# Altium PCB MPCBoard.PcbDoc
Units mil, origin at the board's own origin, x right, y up, seen from the top; angles counter-clockwise.
Board outline 5708.66 x 3740.16 mil, 2 copper layers (Top Layer, Bottom Layer); 110 components, 81 nets, 382 pads, 56 vias.
Unrouted connection lines stored in the file: 212.
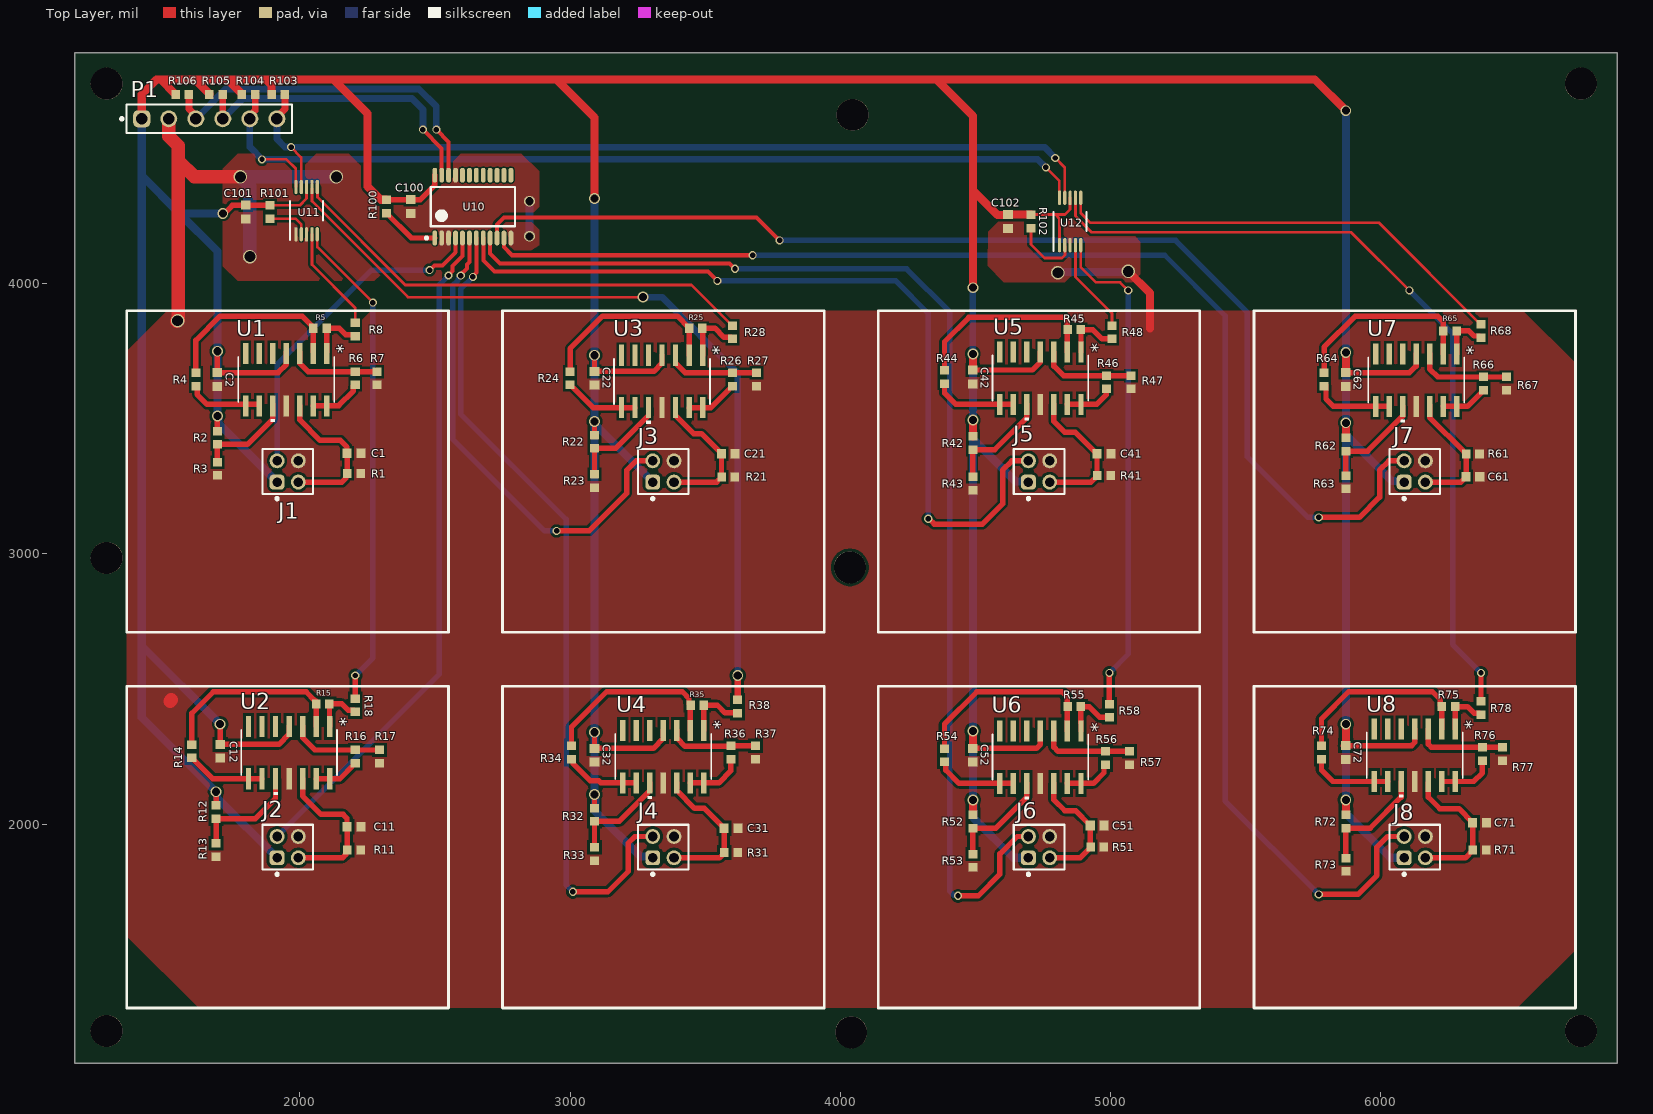
[diagram p0: Top Layer view]
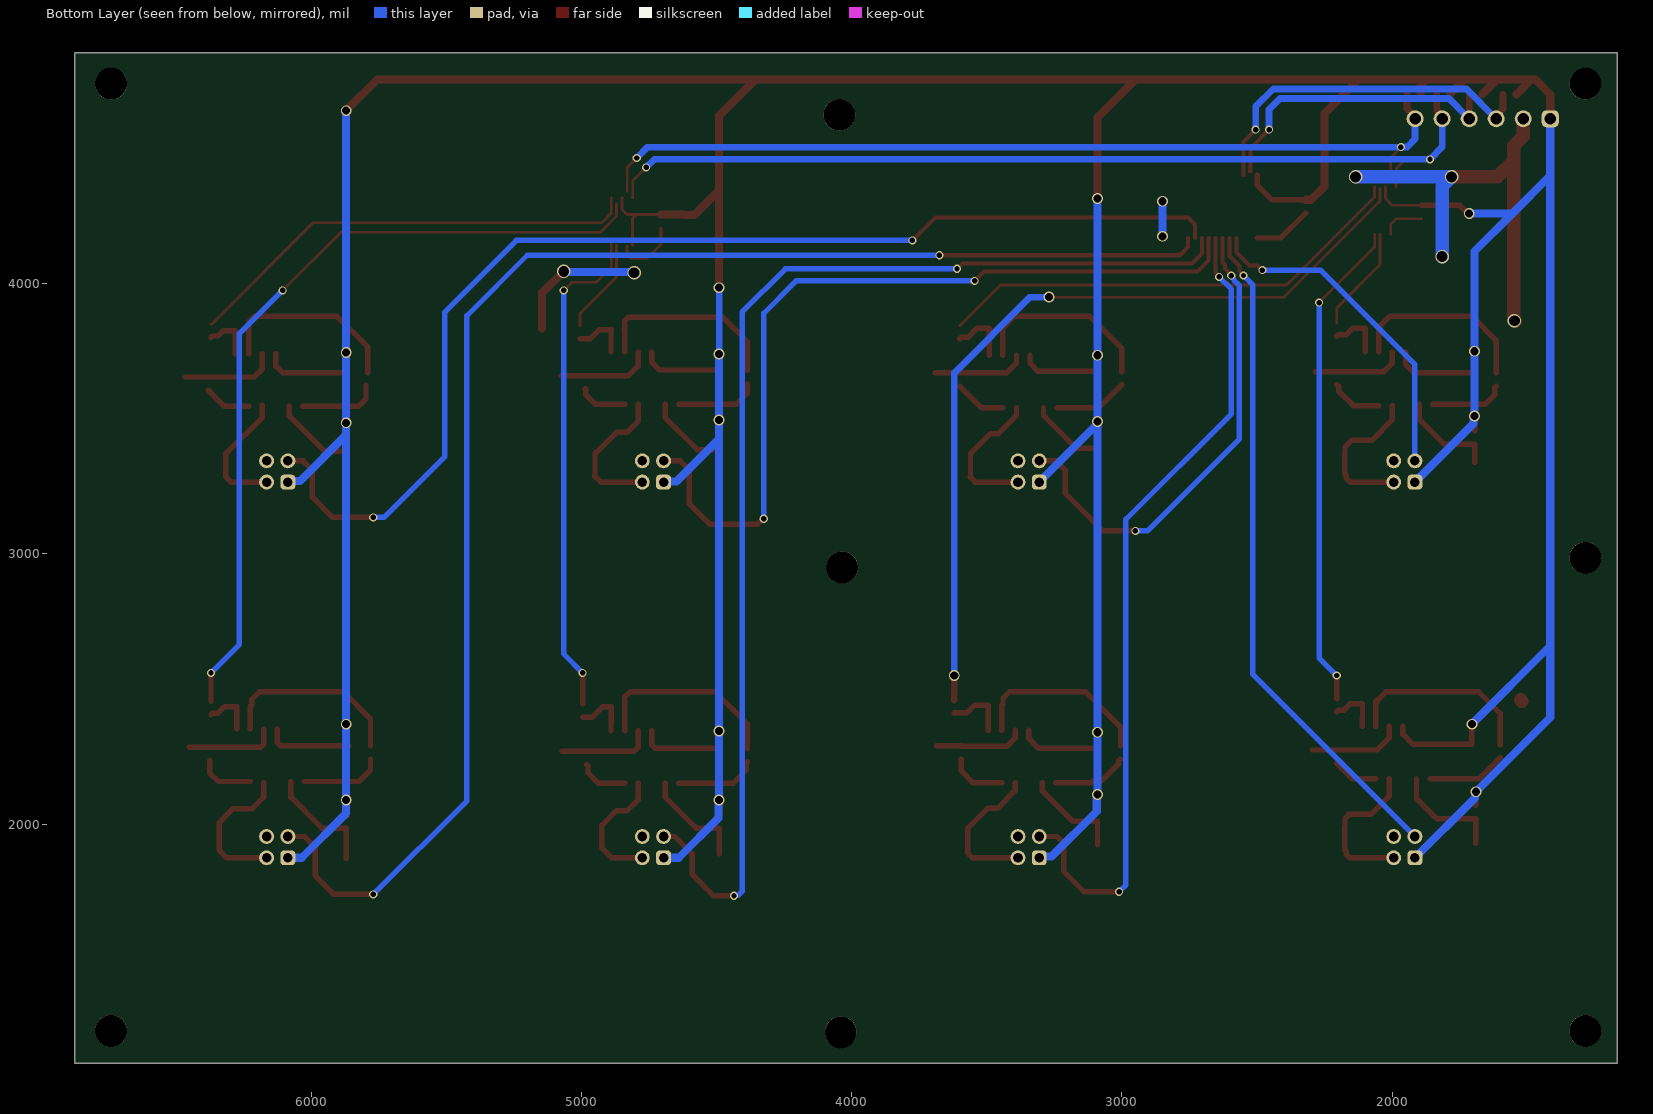
[diagram p1: Bottom Layer view, seen from below]

## Layer stack, top to bottom
Top Solder: solder mask 0.4, Solder Resist, Dk 3.5
Top Layer: signal copper 1.4
Dielectric 1: dielectric 12.6, FR-4, Dk 4.8
Bottom Layer: signal copper 1.4
Bottom Solder: solder mask 0.4, Solder Resist, Dk 3.5

## Board outline
1166.34,1114.84 1166.34,4855 6875,4855 6875,1114.84

## Design rules (kind name [scope] priority, off if disabled: settings)
Clearance Clearance_2 [InComponent('U10')] p1: gap=5 ignorepadtopadclearanceinfootprint=FALSE
Clearance [InComponent('U11') or InComponent('U12')] p2: gap=5 ignorepadtopadclearanceinfootprint=FALSE
Clearance Clearance_1 [All] p3: gap=10 ignorepadtopadclearanceinfootprint=FALSE
HoleSize [All] p1: absolutevalues=TRUE maxlimit=300 minlimit=1 maxpercent=80.000 minpercent=20.000
MinimumSolderMaskSliver [All] p1: minsoldermaskwidth=3
PolygonConnect [All] p1: connectstyle=Direct reliefconductorwidth=10 reliefentries=4 polygonreliefangle="90 Angle" airgapwidth=10
RoutingVias [All] p1: holewidth=28 width=50 viastyle="Through Hole" minholewidth=20 minwidth=30 maxholewidth=40 maxwidth=50
SilkToSilkClearance [All] p1: silktosilkclearance=5
SilkToSolderMaskClearance [IsPad] p1: minsilkscreentomaskgap=4 clearancetoexposedcopper=TRUE
SolderMaskExpansion [All] p1: expansion=4 istentingtop=FALSE
SupplyNets "Schematic Supply Nets_1" [InNet('GND')] p1: voltage=0.000
SupplyNets "Schematic Supply Nets" [InNet('+5V')] p2: voltage=0.000
Width [All] p1: maxlimit=50 minlimit=10 preferedwidth=15 minimp=50.000000 maximp=50.000000 favimp=50.000000
26 further rules are at their usual default settings.

## Components (designator, comment, footprint, x,y, rotation, side; value= is the part's Value field where it differs from the comment)
C1 "100n" CAPC0603(1608)100_N 2200.02,3371.73 r180 top
C2 "100n" CAPC0603(1608)100_N 1695,3645 r270 top
C11 "100n" CAPC0603(1608)100_N 2200,1990 r180 top
C12 "100n" CAPC0603(1608)100_N 1705,2270 r270 top
C21 "100n" CAPC0603(1608)100_N 3585,3370 r180 top
C22 "100n" CAPC0603(1608)100_N 3090,3650 r270 top
C31 "100n" CAPC0603(1608)100_N 3595,1985 r180 top
C32 "100n" CAPC0603(1608)100_N 3090,2255 r270 top
C41 "100n" CAPC0603(1608)100_N 4975,3370 r180 top
C42 "100n" CAPC0603(1608)100_N 4490,3655 r270 top
C51 "100n" CAPC0603(1608)100_N 4950,1995 r180 top
C52 "100n" CAPC0603(1608)100_N 4490,2255 r270 top
C61 "100n" CAPC0603(1608)100_N 6340,3285 r180 top
C62 "100n" CAPC0603(1608)100_N 5870,3645 r270 top
C71 "100n" CAPC0603(1608)100_N 6365,2005 r180 top
C72 "100n" CAPC0603(1608)100_N 5870,2265 r270 top
C100 "100n" CAPC0603(1608)100_N 2410,4285 r90 top
C101 "100n" CAPC0603(1608)100_N 1800,4265 r90 top
C102 "100n" CAPC0603(1608)100_N 4620,4230 r90 top
J1 "62000421821" 62000421821 1955,3305 r0 top locked
J2 "62000421821" 62000421821 1955,1915 r0 top locked
J3 "62000421821" 62000421821 3345,3305 r0 top locked
J4 "62000421821" 62000421821 3345,1915 r0 top locked
J5 "62000421821" 62000421821 4735,3305 r0 top locked
J6 "62000421821" 62000421821 4735,1915 r0 top locked
J7 "62000421821" 62000421821 6125,3305 r0 top locked
J8 "62000421821" 62000421821 6125,1915 r0 top locked
P1 "61300611121" 61300611121 1665,4610 r0 top
R1 "RES" RESC0603(1608)_N 2200.02,3296.73 r0 top
R2 "RES" RESC0603(1608)_N 1695,3430 r270 top
R3 "RES" RESC0603(1608)_N 1695,3315 r270 top
R4 "10k" RESC0603(1608)_N 1615,3645 r90 top
R5 "10k" RESC0603(1608)_N 2075,3835 r180 top
R6 "10k" RESC0603(1608)_N 2205,3650 r90 top
R7 "10k" RESC0603(1608)_N 2285,3650 r90 top
R8 "100" RESC0603(1608)_N 2205,3830 r270 top
R11 "RES" RESC0603(1608)_N 2200,1905 r0 top
R12 "RES" RESC0603(1608)_N 1690,2045 r270 top
R13 "RES" RESC0603(1608)_N 1690,1905 r270 top
R14 "10k" RESC0603(1608)_N 1600,2270 r90 top
R15 "10k" RESC0603(1608)_N 2085,2445 r180 top
R16 "10k" RESC0603(1608)_N 2205,2250 r90 top
R17 "10k" RESC0603(1608)_N 2295,2250 r90 top
R18 "100" RESC0603(1608)_N 2205,2440 r270 top
R21 "RES" RESC0603(1608)_N 3585,3285 r0 top
R22 "RES" RESC0603(1608)_N 3090,3415 r270 top
R23 "RES" RESC0603(1608)_N 3090,3270 r270 top
R24 "10k" RESC0603(1608)_N 3000,3650 r90 top
R25 "10k" RESC0603(1608)_N 3465,3835 r180 top
R26 "10k" RESC0603(1608)_N 3600,3645 r90 top
R27 "10k" RESC0603(1608)_N 3690,3645 r90 top
R28 "100" RESC0603(1608)_N 3600,3820 r270 top
R31 "RES" RESC0603(1608)_N 3595,1895 r0 top
R32 "RES" RESC0603(1608)_N 3090,2035 r270 top
R33 "RES" RESC0603(1608)_N 3090,1890 r270 top
R34 "10k" RESC0603(1608)_N 3005,2265 r90 top
R35 "10k" RESC0603(1608)_N 3470,2440 r180 top
R36 "10k" RESC0603(1608)_N 3595,2265 r90 top
R37 "10k" RESC0603(1608)_N 3685,2265 r90 top
R38 "100" RESC0603(1608)_N 3620,2435 r270 top
R41 "RES" RESC0603(1608)_N 4975,3290 r0 top
R42 "RES" RESC0603(1608)_N 4490,3410 r270 top
R43 "RES" RESC0603(1608)_N 4490,3260 r270 top
R44 "10k" RESC0603(1608)_N 4385,3655 r90 top
R45 "10k" RESC0603(1608)_N 4865,3830 r180 top
R46 "10k" RESC0603(1608)_N 4985,3635 r90 top
R47 "10k" RESC0603(1608)_N 5075,3635 r90 top
R48 "100" RESC0603(1608)_N 5005,3820 r270 top
R51 "RES" RESC0603(1608)_N 4950,1915 r0 top
R52 "RES" RESC0603(1608)_N 4490,2010 r270 top
R53 "RES" RESC0603(1608)_N 4490,1865 r270 top
R54 "10k" RESC0603(1608)_N 4385,2255 r90 top
R55 "10k" RESC0603(1608)_N 4865,2435 r180 top
R56 "10k" RESC0603(1608)_N 4980,2245 r90 top
R57 "10k" RESC0603(1608)_N 5070,2245 r90 top
R58 "100" RESC0603(1608)_N 4995,2420 r270 top
R61 "RES" RESC0603(1608)_N 6340,3370 r0 top
R62 "RES" RESC0603(1608)_N 5870,3405 r270 top
R63 "RES" RESC0603(1608)_N 5870,3265 r270 top
R64 "10k" RESC0603(1608)_N 5790,3645 r90 top
R65 "10k" RESC0603(1608)_N 6255,3825 r180 top
R66 "10k" RESC0603(1608)_N 6380,3630 r90 top
R67 "10k" RESC0603(1608)_N 6465,3630 r90 top
R68 "100" RESC0603(1608)_N 6370,3825 r270 top
R71 "RES" RESC0603(1608)_N 6365,1905 r0 top
R72 "RES" RESC0603(1608)_N 5870,2010 r270 top
R73 "RES" RESC0603(1608)_N 5870,1850 r270 top
R74 "10k" RESC0603(1608)_N 5780,2265 r90 top
R75 "10k" RESC0603(1608)_N 6250,2435 r180 top
R76 "10k" RESC0603(1608)_N 6375,2260 r90 top
R77 "10k" RESC0603(1608)_N 6450,2260 r90 top
R78 "100" RESC0603(1608)_N 6370,2429.61 r270 top
R100 "1K" RESC0603(1608)_N 2320,4285 r270 top
R101 "1K" RESC0603(1608)_N 1890,4265 r270 top
R102 "1K" RESC0603(1608)_N 4705,4230 r270 top
R103 "1K" RESC0603(1608)_N 1920,4700 r180 top
R104 "1K" RESC0603(1608)_N 1810,4700 r180 top
R105 "1K" RESC0603(1608)_N 1690,4700 r180 top
R106 "1K" RESC0603(1608)_N 1565,4700 r180 top
U1 "TS914" SO-14_STM 1950,3645 r270 top
U2 "TS914" SO-14_STM 1960,2265 r270 top
U3 "TS914" SO-14_STM 3340,3638 r270 top
U4 "TS914" SO-14_STM 3345,2250 r270 top
U5 "TS914" SO-14_STM 4740,3650 r270 top
U6 "TS914" SO-14_STM 4740,2248 r270 top
U7 "TS914" SO-14_STM 6130,3643 r270 top
U8 "TS914" SO-14_STM 6125,2255 r270 top
U10 "PCA9535A" TSSOP24-8N 2640,4285 r90 top
U11 "ADS1015IDGST" DGS0010A_N 2025,4270 r90 top
U12 "ADS1015IDGST" DGS0010A_N 4850,4230 r90 top

## Footprints (in the part's own frame and the unit in brackets; to place one, negate y for a bottom-side part, rotate by r counter-clockwise, add the part's x,y. Pads: shape width x height; smd on the part's side, far side on the other; paste and mask are expansions set on the pad)
61300611121 [mm] "Pin Header, pitch 2.54 mm, THT, Vertical, single row, 6p"
  rrect50% 1.6x1.6 hole 1.1: 1(-6.35,0)
  round 1.6 hole 1.1: 2(-3.81,0) 3(-1.27,0) 4(1.27,0) 5(3.81,0) 6(6.35,0)
  silkscreen extent -8.34,-1.35 7.77,1.35, body extent -7.62,-1.27 7.62,1.27, height 8.57
62000421821 [mm] "Socket Header, Pitch 2.00 mm, THT, Vertical, dual row, 4p"
  rrect50% 1.4x1.4 hole 0.9: 1(-1,-1)
  round 1.4 hole 0.9: 2(-1,1) 3(1,-1) 4(1,1)
  silkscreen extent -2.37,-2.67 2.37,2.1, body extent -2.3,-2 2.3,2, height 4.35
CAPC0603(1608)100_N [mm] "Chip Capacitor, 2-Leads, Body 1.60x0.80mm, IPC High Density"
  rect 0.85x0.9 smd: 1(-0.65,0) 2(0.65,0)
  body extent -0.88,-0.48 0.87,0.48, height 0.45
DGS0010A_N [mm]
  oval 1.35x0.3 smd paste+0 mask+0.051: 1(-2.225,1) 2(-2.225,0.5) 3(-2.225,0) 4(-2.225,-0.5) 5(-2.225,-1) 6(2.225,-1) 7(2.225,-0.5) 8(2.225,0) 9(2.225,0.5) 10(2.225,1)
  silkscreen extent -2.75,-1.55 0.9,1.55
RESC0603(1608)_N [mm] "Chip Resistor, 2-Leads, Body 1.60x0.80mm, IPC High Density"
  rect 0.8x0.85 smd: 1(-0.625,0) 2(0.625,0)
  body extent -0.87,-0.48 0.87,0.48, height 0.45
SO-14_STM [mil]
  rect 78x20 smd paste+0 mask+0: 1(-97,150) 2(-97,100) 3(-97,50) 4(-97,0) 5(-97,-50) 6(-97,-100) 7(-97,-150) 8(97,-150) 9(97,-100) 10(97,-50) 11(97,0) 12(97,50) 13(97,100) 14(97,150)
  silkscreen extent -84,-178 156,178, body extent -122,-173 122,173, height 69
TSSOP24-8N [mm]
  oval 1.4x0.45 smd: 1(-2.95,3.575) 2(-2.95,2.925) 3(-2.95,2.275) 4(-2.95,1.625) 5(-2.95,0.975) 6(-2.95,0.325) 7(-2.95,-0.325) 8(-2.95,-0.975) 9(-2.95,-1.625) 10(-2.95,-2.275) 11(-2.95,-2.925) 12(-2.95,-3.575) 13(2.95,-3.575) 14(2.95,-2.925) 15(2.95,-2.275) 16(2.95,-1.625) 17(2.95,-0.975) 18(2.95,-0.325) 19(2.95,0.325) 20(2.95,0.975) 21(2.95,1.625) 22(2.95,2.275) 23(2.95,2.925) 24(2.95,3.575)
  silkscreen extent -3.07,-3.95 1.85,4.47, body extent -3.2,-3.9 3.2,3.9, height 1.2

## Part data
C1 C2 C11 C12 C21 C22 C31 C32 C41 C42 C51 C52 C61 C62 C71 C72 C100 C101 C102: library part CAP, "CAP"
J1 J2 J3 J4 J5 J6 J7 J8: "WR-PHD Socket Header, THT, Vertical, pitch 2mm, 2 Row, 4P", Contact Resistance=20mOhm, Manufacturer="Wurth Elektronik", Operating Temperature Max=105°C, Operating Temperature Min=-40°C, Rated Current=2A, Withstanding Voltage=500V, Working Voltage=250V, Category="Board-to-Board Connectors", ComponentLink1Description="Website Link", ComponentLink1URL=https://www.we-online.com/redexpert/article/62000421821?ad, ComponentLink2Description="Datasheet Link", ComponentLink2URL=https://www.we-online.com/redexpert/spec/62000421821?ad, Gender="Socket Header", Manufacturer Part Number=62000421821, Match Code=WR-PHD, Mount="Through Hole", Number of Pins=4, Number of Rows=2, Orientation=Vertical, Packaging=Tube, Pitch=2mm
P1: "WR-PHD Pin Header, THT, Vertical, pitch 2.54mm, 1 Row, 6P", Contact Resistance=20mOhm, Manufacturer="Wurth Elektronik", Operating Temperature Max=105°C, Operating Temperature Min=-40°C, Rated Current=3A, Withstanding Voltage=500V, Working Voltage=250V, Category="Board-to-Board Connectors", ComponentLink1Description="Website Link", ComponentLink1URL=https://www.we-online.com/redexpert/article/61300611121?ad, ComponentLink2Description="Datasheet Link", ComponentLink2URL=https://www.we-online.com/redexpert/spec/61300611121?ad, Gender="Pin Header", Manufacturer Part Number=61300611121, Match Code=WR-PHD, Mount="Through Hole", Number of Pins=6, Number of Rows=1, Orientation=Vertical, Packaging=Bag, Pitch=2.54mm
R4 R5 R6 R7 R8 R14 R15 R16 R17 R18 R24 R25 R26 R27 R28 R34 R35 R36 R37 R38 R44 R45 R46 R47 R48 R54 R55 R56 R57 R58 R64 R65 R66 R67 R68 R74 R75 R76 R77 R78 R100 R101 R102 R103 R104 R105 R106: library part RES, "RES"
U10: "Low-voltage 16-bit I2C-bus I/O port with interrupt"
U11 U12: "12-bit, 3.3-kSPS, 4-channel, delta-sigma ADC with PGA, oscillator, VREF, comparator and I2C 10-VSSOP -40 to 125", Manufacturer="Texas Instruments", PartNumber=ADS1015IDGSR, Alternate_PartNumber=ADS1015IDGST, CompType=IC, Copyright="Copyright (C) 2025 Ultra Librarian. All rights reserved.", Datasheet=https://www.ti.com/lit/gpn/ads1015, Manufacturer_Name="Texas Instruments", Manufacturer_Part_Number=ADS1015IDGST, MountType=SMT, PackageReference=DGS0010A, RefDes=RefDes, RoHS=Y, Type=TYPE

## Free pads (board coordinates)
  round 118.11 hole 118.11: 14(1285,1235) 14(1285,2985) 14(1285,4740) 14(4035,2950) 14(4040,1230) 14(4045,4625) 14(6740,1235) 14(6740,4740)

## Via types
v1: diameter 30, hole 20, Top Layer to Bottom Layer, tented both sides, 26 vias
v2: diameter 40, hole 30, Top Layer to Bottom Layer, tented both sides, 24 vias
v3: diameter 50, hole 40, Top Layer to Bottom Layer, tented both sides, 6 vias

## Nets (pads, with @x,y where several pads share a name; then routed paths per layer and width w, separated by ;. In a path a pad name is that pad's centre, name@x,y a point inside that pad or via, vN(x,y) a via of type N, cw(c..) or ccw(c..) an arc to the next point about the centre after c; other vN are vias at no path point)
+5V: C2.1 C12.1 C22.1 C32.1 C42.1 C52.1 C62.1 C72.1 C100.2 C101.2 C102.2 J1.1 J2.1 J3.1 J4.1 J5.1 J6.1 J7.1 J8.1 P1.1 R2.1 R12.1 R22.1 R32.1 R42.1 R52.1 R62.1 R72.1 R100.1 R101.1 R102.1 R103.2 R104.2 R105.2 R106.2 U1.4 U2.4 U3.4 U4.4 U5.4 U6.4 U7.4 U8.4 U10.24 U11.8 U12.1 U12.8 | length 24768.2
  Top Layer w10: R101.1 1999.61,4289.61 2024.65,4314.65 2024.65,4357.25 U11.8 ; R102.1@4705,4255.59 4795,4255.59 ; U12.1 4810.63,4239.96 4795,4255.59 ; U12.8 4849.65,4317.25 4849.65,4274.65 4830.59,4255.59 4795,4255.59
  Top Layer w20: R12.1 v2(1690,2120) ; R2.1 v2(1695,3510) ; v2(1695,3750) C2.1 1919.41,3670.59 1950,3701.18 U1.4@1950,3747 ; v2(1705,2370) C12.1 1922.59,2295.59 1960,2333 U2.4 ; v2(1715,4260) 1720.41,4260 1750.02,4289.61 R101.1 ; R100.1 2320.49,4310.1 2409.51,4310.1 C100.2 2410.41,4311 2446,4311 2499.25,4364.25 U10.24 ; R32.1 v2(3090,2110) ; v2(3090,2340) C32.1 3307.59,2280.59 3345,2318 U4.4 ; R22.1 v2(3090,3490) ; v2(3090,3735) C22.1 3309.59,3675.59 3340,3706 U3.4 ; C52.1 4725.59,2280.59 4740,2295 U6.4 ; C42.1 4710.59,3680.59 4740,3710 U5.4 ; C72.1@5860,2290.59 5865.77,2290.59 C72.1 6113.28,2290.59 6125,2302.31 U8.4 ; C62.1 6105.59,3670.59 6130,3695 U7.4
  Top Layer w25: R105.2 R105.2@1665.39,4700.98 ; R104.2 R104.2@1785.39,4700.98 ; R103.2@1895,4700.39 R103.2 ; C102.2@4618.45,4254.04 C102.2 ; C72.1@5865.77,2290.59 C72.1@5870,2294.82
  Top Layer w30: P1.1 1415,4700 1470,4755 1485.39,4755 ; R106.2 1540.39,4700.98 1539.65,4701.73 1538.66,4701.73 1485.39,4755 ; R105.2@1665.39,4700.98 1611.38,4755 ; R104.2@1785.39,4700.98 1731.38,4755 ; R103.2@1895,4700.39 1895,4735 1875,4755 ; R100.1 2319.25,4310.35 2299.65,4310.35 2250,4360 2250,4630 2125,4755 ; v2(3090,4315) 3090,4615 2950,4755 ; R52.1 v2(4490,2090) ; C52.1 v2(4490,2345) ; R42.1 v2(4490,3495) ; C42.1 v2(4490,3740) ; v2(4490,3985) 4490,4345 ; C102.2@4618.45,4254.04 4580.96,4254.04 4490,4345 ; C102.2@4620.49,4255.1 4704.51,4255.1 R102.1@4705,4255.59 ; R72.1 v2@5870,2085 ; C72.1@5870,2294.82 v2(5870,2370) ; R62.1 v2(5870,3485) ; C62.1 v2(5870,3745) ; v2(5870,4640) 5755,4755 4355,4755 ; 1485.39,4755 1611.38,4755 ; 1611.38,4755 1731.38,4755 ; 1731.38,4755 1875,4755 ; 1875,4755 2125,4755 ; 2125,4755 2950,4755 ; 2950,4755 4355,4755 ; 4355,4755 4490,4620 4490,4345
  Bottom Layer w25: v2(4490,3740) v2(4490,3985)
  Bottom Layer w30: P1.1 1415,4400 ; v2(1705,2370) 1415,2660 ; v2(1715,4260) 1555,4260 ; J2.1 1693.83,2097.43 1693.83,2116.17 v2(1690,2120) 1415,2395 1415,2660 ; J1.1 1698.83,3482.43 1698.83,3506.17 v2(1695,3510) v2(1695,3750) 1695,4120 1555,4260 ; v2(3090,4315) v2(3090,3490) ; J4.1 3301.22,1880.04 3259.96,1880.04 3092.87,2047.13 3092.87,2107.13 v2(3090,2110) v2(3090,2340) v2(3090,3490) ; J3.1 3092.87,3478.39 3092.87,3487.13 v2(3090,3490) ; v2@4490,3737.29 v2(4490,3495) 4490,3425 ; J6.1 4639.37,1875.63 4491.91,2023.09 4491.91,2088.09 v2(4490,2090) v2(4490,2345) 4490,3425 ; J5.1 4693.42,3267.84 4647.16,3267.84 4490,3425 ; v2(5870,4640) v2(5870,3745) v2(5870,3485) 5870,3440 ; J8.1 6034.37,1875.63 5870,2040 v2(5870,2370) 5870,3440 ; J7.1 6081.22,3270.04 6039.96,3270.04 5870,3440 ; 1415,2660 1415,4400 ; 1415,4400 1555,4260
  other v2: 5870,2090
GND: C1.1 C2.2 C11.1 C12.2 C21.1 C22.2 C31.1 C32.2 C41.1 C42.2 C51.1 C52.2 C61.1 C62.2 C71.1 C72.2 C100.1 C101.1 C102.1 J1.4 J2.4 J3.4 J4.4 J5.4 J6.4 J7.4 J8.4 P1.2 R1.2 R3.2 R7.1 R11.2 R13.2 R17.1 R21.2 R23.2 R27.1 R31.2 R33.2 R37.1 R41.2 R43.2 R47.1 R51.2 R53.2 R57.1 R61.2 R63.2 R67.1 R71.2 R73.2 R77.1 U1.11 U2.11 U3.11 U4.11 U5.11 U6.11 U7.11 U8.11 U10.2 U10.3 U10.12 U10.21 U11.1 U11.3 U12.3 | length 2329.4
  Top Layer w30: v3(5065,4045) 5145,3965 5145,3833.79
  Top Layer w50: P1.2 1515,4545 1550,4510 1550,4455 ; 1520,2455 1525,2460 ; v3@1545,3860 1550,3865 1550,4455 ; v3(1780,4395) 1610,4395 1550,4455
  Bottom Layer w30: v2(2850,4175) v2(2850,4305) ; v3(4805,4040) 4807.5,4042.5 5062.5,4042.5 v3(5065,4045)
  Bottom Layer w50: v3(1815,4100) 1815,4360 v3(1780,4395) v3(2135,4395)
  other v3: 1547.5,3862.5
NetC1_2: C1.2 J1.3 R1.1 U1.12 | length 568.2
  Top Layer w20: J1.3 2155.63,3265.63 2169.66,3279.66 2169.66,3290.98 R1.1 2174.92,3297.22 2174.92,3371.24 C1.2 2174.43,3395.57 2150,3420 2075.36,3420 2000,3495.36 U1.12
NetC11_2: C11.2 J2.3 R11.1 U2.12 | length 579.6
  Top Layer w20: J2.3 2157.93,1875.63 2169.65,1887.35 2169.65,1899.25 R11.1 2174.9,1905.49 2174.9,1989.51 C11.2 2174.41,2021.82 2160.17,2036.06 2078.35,2036.06 2010,2104.41 U2.12
NetC21_2: C21.2 J3.3 R21.1 U3.12 | length 527.8
  Top Layer w20: J3.3 3542.01,3265.63 3560.39,3284.02 R21.1 3559.9,3285.49 3559.9,3369.51 C21.2 3559.41,3370.98 3485.54,3444.86 3457.14,3444.86 3390,3512 U3.12
NetC31_2: C31.2 J4.3 R31.1 U4.12 | length 546.6
  Top Layer w20: J4.3 3552.01,1875.63 3570.39,1894.02 R31.1 3569.9,1895.49 3569.9,1984.51 C31.2 3569.41,1985.98 3497.04,2058.36 3460.64,2058.36 3395,2124 U4.12
NetC41_2: C41.2 J5.3 R41.1 U5.12 | length 538.4
  Top Layer w20: J5.3 4927.01,3265.63 4950.39,3289.02 R41.1 ; U5.12 4790,3490 4829.14,3450.86 4868.55,3450.86 4941.69,3377.72 4942.68,3377.72 4949.41,3370.98 R41.1@4949.41,3290.98
NetC51_2: C51.2 J6.3 R51.1 U6.12 | length 483.7
  Top Layer w20: J6.3 4887.01,1875.63 4925.39,1914.02 R51.1 4924.9,1915.49 4924.9,1994.51 C51.2 4924.41,1995.98 4870.39,2050 4830,2050 4790,2090 U6.12
NetC61_2: C61.2 J7.3 R61.1 U7.12 | length 480.7
  Top Layer w20: J7.3 6296.02,3265.63 6314.41,3284.02 C61.2 6314.9,3285.49 6314.9,3369.51 R61.1 6315.39,3370.98 6309.65,3376.73 6308.66,3376.73 6180,3505.39 U7.12@6180,3550
NetC71_2: C71.2 J8.3 R71.1 U8.12 | length 546.5
  Top Layer w20: J8.3 6312.01,1875.63 6340.39,1904.02 R71.1 6339.9,1905.49 6339.9,2004.51 C71.2 6339.41,2005.98 6287.95,2057.45 6217.55,2057.45 6175,2100 U8.12@6175,2153
NetJ1_2: J1.2 U10.4 | length 1241.5
  Top Layer w15: v1(2480,4050) 2497.86,4067.86 2527.86,4067.86 2576.02,4116.02 U10.4
  Bottom Layer w20: J1.2 1915.63,3700.63 2265,4050 v1(2480,4050)
NetJ2_2: J2.2 U10.5 | length 2498.6
  Top Layer w15: v1(2550,4030) 2550,4031.29 2565,4046.29 2565,4065 2601.61,4101.61 U10.5
  Bottom Layer w20: J2.2 2515,2553.74 2515,3995 v1(2550,4030)
NetJ3_2: J3.2 U10.6 | length 1808.3
  Top Layer w15: v1(2595.25,4029.75) 2595.25,4033.81 2617.92,4056.48 2617.92,4070.72 2627.2,4080 U10.6
  Top Layer w20: v1(2950,3085) 3070,3085 3210,3225 3210,3310 3244.37,3344.37 J3.2
  Bottom Layer w20: v1(2595.25,4029.75) 2595.25,4027.04 2585,4016.79 2585,4012.43 2565,3992.43 2565,3425 2905,3085 v1(2950,3085)
NetJ4_2: J4.2 U10.7 | length 3056.5
  Top Layer w15: v1(2640,4025) 2640,4029.06 2652.8,4041.85 U10.7
  Top Layer w20: v1(3010,1750) 3140,1750 3215,1825 3215,1930 3239.37,1954.37 J4.2
  Bottom Layer w20: v1(2640,4025) 2595,3980 2595,3518.17 2985,3128.17 2985,1775 v1(3010,1750)
NetJ5_2: J5.2 U10.8 | length 3119.5
  Top Layer w15: U10.8 2678.91,4168.34 2678.91,4086.09 2720,4045 3510,4045 v1(3545,4010)
  Top Layer w20: v1(4325,3130) 4327.71,3130 4347.71,3110 4525,3110 4600,3185 4600,3310 4634.37,3344.37 J5.2
  Bottom Layer w20: v1(3545,4010) 4205,4010 4325,3890 v1(4325,3130)
NetJ6_2: J6.2 U10.9 | length 4424
  Top Layer w15: U10.9 2703.98,4111.02 2740,4075 3590,4075 v1(3610,4055)
  Top Layer w20: v1(4435,1735) 4510,1735 4590,1815 4590,1890 4654.3,1954.3 4695.56,1954.3 J6.2
  Bottom Layer w20: v1(3610,4055) 4245,4055 4405,3895 4405,1751.72 4419.8,1736.91 4433.09,1736.91 v1(4435,1735)
NetJ7_2: J7.2 U10.10 | length 4335.8
  Top Layer w15: U10.10 2729.57,4219.57 2755,4245 3690,4245 v1(3775,4160)
  Top Layer w20: v1(5770,3135) 5920,3135 5995,3210 5995,3310 6029.37,3344.37 J7.2
  Bottom Layer w20: v1(3775,4160) 5240,4160 5505,3895 5505,3360 5730,3135 v1(5770,3135)
NetJ8_2: J8.2 U10.11 | length 5558.3
  Top Layer w15: U10.11 2755.16,4134.84 2785,4105 v1(3675,4105)
  Top Layer w20: v1(5770,1740) 5915,1740 5985,1810 5985,1915 6024.37,1954.37 J8.2
  Bottom Layer w20: v1(3675,4105) 5200,4105 5423.79,3881.21 5423.79,2086.21 v1(5770,1740)
NetP1_3: P1.3 R106.1 U10.22 | length 1334.3
  Top Layer w15: v1(2505,4570) 2550.43,4524.57 U10.22
  Top Layer w25: R106.1 1589.61,4645.67 1615,4620.28 P1.3
  Bottom Layer w25: P1.3 1725,4720 2440,4720 2505,4655 v1@2505,4571.35
NetP1_4: P1.4 R105.1 U10.23 | length 1137.6
  Top Layer w15: v1(2455,4570) 2524.84,4500.16 2524.84,4421.1 2525,4420.94 U10.23@2525,4415
  Top Layer w25: R105.1 1714.8,4699.8 1714.8,4610.2 P1.4
  Bottom Layer w25: P1.4 1790,4685 2415,4685 2455.96,4644.04 2455.96,4570.96 v1(2455,4570)
NetP1_5: P1.5 R104.1 U11.10 U12.10 | length 3519.7
  Top Layer w10: v1(1860,4460) 1950,4460 1985,4425 1985,4379.39 1985.63,4378.76 U11.10 ; v1(4760,4430) 4810,4380 4810,4318.23 U12.10
  Top Layer w25: P1.5 1815,4620.28 1834.61,4639.89 R104.1
  Bottom Layer w25: P1.5 1815,4505 v1(1860,4460) 4730,4460 v1(4760,4430)
NetP1_6: P1.6 R103.1 U11.9 U12.9 | length 3359.7
  Top Layer w10: v1(1967.5,4505) 2005,4467.5 2005,4385 ; v1(4795,4465) 4830,4430 U12.9@4830,4341.6
  Top Layer w25: P1.6 1915,4616.16 1944.61,4645.77 R103.1
  Bottom Layer w25: P1.6 1915,4535 1944.13,4505.87 1966.63,4505.87 v1(1967.5,4505) 4755,4505 v1(4795,4465)
NetR2_2: R2.2 R3.1 U1.10 | length 363
  Top Layer w20: R3.1 R2.2 1805.39,3405.39 1900,3500 U1.10@1900,3553
NetR4_1: R4.1 U1.8 U1.9 | length 277.8
  Top Layer w20: R4.1 1619.76,3615.64 1619.76,3590.24 1657,3553 1800,3553 U1.9@1850,3553
NetR4_2: R4.2 R5.2 U1.2 | length 701
  Top Layer w20: R4.2 1615,3790 1705,3880 2008.28,3880 2044.65,3843.64 2044.65,3840.75 R5.2 ; U1.2@2050,3747 R5.2@2050,3834.61
NetR5_1: R5.1 R8.2 U1.1 | length 205.8
  Top Layer w20: U1.1@2100,3747 2100,3834.61 R5.1 2145.35,3835 2169.21,3811.14 2199.25,3811.14 R8.2
NetR6_1: R6.1 U1.13 U1.14 | length 197
  Top Layer w20: U1.13 U1.14 2100,3548.68 2143.68,3548.68 2198.27,3603.27 2198.27,3619.65 2204.02,3625.39 R6.1
NetR6_2: R6.2 R7.2 U1.3 | length 339.6
  Top Layer w20: U1.3@2000,3747 2000,3705 2030.39,3674.61 R6.2 R7.2
NetR8_1: R8.1 U11.4 | length 394.2
  Top Layer w10: U11.4 2044.68,4070.32 2205,3910 R8.1
NetR12_2: R12.2 R13.1 U2.10 | length 414.7
  Top Layer w20: R13.1 R12.2 1835.39,2020.39 1910,2095 U2.10
NetR14_1: R14.1 U2.8 U2.9 | length 292.1
  Top Layer w20: R14.1 1600.98,2245.39 1678.38,2168 U2.8 U2.9
NetR14_2: R14.2 R15.2 U2.2 | length 721.2
  Top Layer w20: R14.2 1600,2410 1680,2490 2022.93,2490 2054.65,2458.28 2054.65,2451.73 R15.2@2060,2451.73 ; U2.2 R15.2@2060,2455
NetR15_1: R15.1 R18.2 U2.1 | length 190.8
  Top Layer w20: U2.1 2110,2391 2109.61,2391.39 R15.1 2155.35,2445 2179.21,2421.14 2199.25,2421.14 R18.2
NetR16_1: R16.1 U2.13 U2.14 | length 169.3
  Top Layer w20: U2.13 U2.14 2147.61,2168 2198.27,2218.66 2198.27,2219.65 2204.02,2225.39 R16.1
NetR16_2: R16.2 R17.2 U2.3 | length 345.8
  Top Layer w20: U2.3 2010,2320 2055.39,2274.61 R16.2 R17.2
NetR18_1: R18.1 U11.5 | length 1829.8
  Top Layer w10: U11.5@2064.68,4182.4 2064.68,4135.31 v1(2270,3930)
  Top Layer w20: R18.1 v1(2205,2550)
  Bottom Layer w20: v1(2205,2550) 2270,2615 v1(2270,3930)
NetR22_2: R22.2 R23.1 U3.10 | length 375.2
  Top Layer w20: R23.1 R22.2 3168.39,3390.39 3290,3512 U3.10
NetR24_1: R24.1 U3.8 U3.9 | length 275
  Top Layer w20: R24.1 3000.98,3625.39 3085.38,3541 U3.8 U3.9
NetR24_2: R24.2 R25.2 U3.2 | length 694.9
  Top Layer w20: R24.2 3000,3760 3120,3880 3396.38,3880 3440.39,3835.98 R25.2 3440,3834.61 U3.2
NetR25_1: R25.1 R28.2 U3.1 | length 227
  Top Layer w20: U3.1 3490,3834.61 R25.1 3535.35,3835 3569.21,3801.14 3594.25,3801.14 R28.2
NetR26_1: R26.1 U3.13 U3.14 | length 193.5
  Top Layer w20: U3.13 U3.14 3520.61,3541 3593.27,3613.66 3593.27,3614.65 3599.02,3620.39 R26.1
NetR26_2: R26.2 R27.2 U3.3 | length 344.1
  Top Layer w20: U3.3 3390,3706 3426.39,3669.61 R26.2 R27.2
NetR28_1: R28.1 U11.6 | length 1769.8
  Top Layer w10: U11.6 2065,4356.97 2065,4320 2390,3995 3448.62,3995 3599.02,3844.61 R28.1
NetR32_2: R32.2 R33.1 U4.10 | length 366.8
  Top Layer w20: R33.1@3090,1924.61 R32.2 3181.39,2010.39 3295,2124 U4.10
NetR34_1: R34.1 U4.8 U4.9 | length 282.9
  Top Layer w20: R34.1 3005.98,2240.39 3011.73,2234.65 3011.73,2223.27 3075,2160 3106.57,2160 3113.57,2153 U4.8 U4.9
NetR34_2: R34.2 R35.2 U4.2 | length 690
  Top Layer w20: R34.2 3005,2360 3135,2490 3415,2490 3439.65,2465.35 3439.65,2445.75 R35.2 3445,2439.61 U4.2
NetR35_1: R35.1 R38.2 U4.1 | length 230.8
  Top Layer w20: U4.1 3495,2376 3494.61,2376.39 R35.1 3544.88,2440 3573.27,2411.61 3618.78,2411.61 R38.2
NetR36_1: R36.1 U4.13 U4.14 | length 211
  Top Layer w20: U4.13 3550,2153 3595,2198 R36.1
NetR36_2: R36.2 R37.2 U4.3 | length 332.1
  Top Layer w20: U4.3 3395,2318 3425,2288 3593.39,2288 R36.2 R37.2
NetR38_1: R38.1 U11.7 | length 3094.7
  Top Layer w10: U11.7@2045,4351.3 2045,4305 2400,3950 v2(3270,3950)
  Top Layer w25: R38.1 v2(3620,2550)
  Bottom Layer w25: v2(3270,3950) 3340,3950 3620,3670 v2(3620,2550)
NetR42_2: R42.2 R43.1 U5.10 | length 398.3
  Top Layer w20: R43.1 R42.2 4570.39,3385.39 4690,3505 U5.10
NetR44_1: R44.1 U5.8 U5.9 | length 307.8
  Top Layer w20: R44.1 4385,3595 4427,3553 U5.8 U5.9
NetR44_2: R44.2 R45.2 U5.2 | length 718.3
  Top Layer w20: R44.2 4385,3785 4475,3875 4827.06,3875 4838.77,3863.28 4838.77,3831.62 R45.2 ; U5.2 R45.2@4840,3830
NetR45_1: R45.1 R48.2 U5.1 | length 211.9
  Top Layer w20: R45.1 4890,3829.61 R45.1@4890,3828.62 ; U5.1 R45.1@4890,3828.62 ; R48.2 4967.8,3795.39 4934.57,3828.62 R45.1@4890,3828.62
NetR46_1: R46.1 U5.13 U5.14 | length 181.3
  Top Layer w20: U5.13 U5.14 4948,3553 4984.02,3589.02 4984.02,3610.39 R46.1
NetR46_2: R46.2 R47.2 U5.3 | length 351.7
  Top Layer w20: U5.3 4790,3695 4825.39,3659.61 R46.2 R47.2
NetR48_1: R48.1 U12.4 | length 353.8
  Top Layer w10: U12.4 4869.69,4025.32 5005,3890 R48.1
NetR52_2: R52.2 R53.1 U6.10 | length 394.3
  Top Layer w20: R53.1 R52.2 4575.39,1985.39 4690,2100 U6.10
NetR54_1: R54.1 U6.8 U6.9 | length 302.8
  Top Layer w20: R54.1 4389.76,2225.64 4389.76,2200.24 4439,2151 U6.9
NetR54_2: R54.2 R55.2 U6.2 | length 728.4
  Top Layer w20: R54.2 4385,2370 4505,2490 4820,2490 4840,2470 U6.2
NetR55_1: R55.1 R58.2 U6.1 | length 212
  Top Layer w20: U6.1 4890,2374 4889.61,2374.39 R55.1 4920,2435 4959.61,2395.39 R58.2
NetR56_1: R56.1 U6.13 U6.14 | length 183.6
  Top Layer w20: U6.13 4936,2151 4975.24,2190.24 4975.24,2215.64 R56.1
NetR56_2: R56.2 R57.2 U6.3 | length 346.4
  Top Layer w20: U6.3 4790,2285 4805.39,2269.61 R56.2 R57.2
NetR58_1: R58.1 U12.5 | length 1860.9
  Top Layer w10: U12.5@4889.37,4151 4889.69,4150.69 4889.69,4060.32 4945,4005 5035,4005 v1(5065,3975)
  Top Layer w20: R58.1 v1(4995,2560)
  Bottom Layer w20: v1(4995,2560) 5065,2630 v1(5065,3975)
NetR62_2: R62.2 R63.1 U7.10 | length 390.5
  Top Layer w20: R63.1 R62.2 5950.39,3380.39 6080,3510 U7.10
NetR64_1: R64.1 U7.8 U7.9 | length 295.9
  Top Layer w20: R64.1@5796.73,3624.65 5796.73,3573.27 5824,3546 U7.8 U7.9
NetR64_2: R64.2 R65.2 U7.2 | length 711.6
  Top Layer w20: R64.2 5790,3765 5905,3880 6210,3880 6230.24,3859.76 6230.24,3825.15 R65.2 6230,3824.61 U7.2
NetR65_1: R65.1 R68.2 U7.1 | length 185.7
  Top Layer w20: U7.1 6280,3824.61 R65.1 6325.35,3825 6344.21,3806.14 6364.25,3806.14 R68.2
NetR66_1: R66.1 U7.13 U7.14 | length 174.8
  Top Layer w20: U7.13 U7.14 6320,3546 6373.27,3599.27 6373.27,3599.65 6379.02,3605.39 R66.1
NetR66_2: R66.2 R67.2 U7.3 | length 352.6
  Top Layer w20: U7.3 6180,3685 6210.39,3654.61 R66.2 R67.2
NetR68_1: R68.1 U12.6 | length 1707.9
  Top Layer w10: U12.6 4889.65,4317.31 4889.65,4260.35 4925,4225 5993.62,4225 6369.02,3849.61 R68.1
NetR72_2: R72.2 R73.1 U8.10 | length 421.3
  Top Layer w20: R73.1 R72.2 5960.39,1985.39 6075,2100 U8.10
NetR74_1: R74.1 U8.8 U8.9 | length 302.8
  Top Layer w20: R74.1 5780,2200 5822,2158 U8.8 U8.9
NetR74_2: R74.2 R75.2 U8.2 | length 704.6
  Top Layer w20: R74.2 5780,2390 5880,2490 6190,2490 6219.65,2460.35 6219.65,2440.75 R75.2 6225,2434.61 U8.2
NetR75_1: R75.1 R78.2 U8.1 | length 191
  Top Layer w20: U8.1 6275,2434.61 R75.1 6320.35,2435 6344.61,2410.75 6364.25,2410.75 R78.2
NetR76_1: R76.1 U8.13 U8.14 | length 208.6
  Top Layer w20: U8.13 U8.14 6343,2158 6375,2190 R76.1
NetR76_2: R76.2 R77.2 U8.3 | length 335.5
  Top Layer w20: U8.3 6175,2296.32 6186.72,2284.61 R77.2
NetR78_1: R78.1 U12.7 | length 3024.6
  Top Layer w10: U12.7@4869.65,4295 4869.65,4250.35 4930,4190 5890,4190 v1(6105,3975)
  Top Layer w20: R78.1 v1(6370,2560)
  Bottom Layer w20: v1(6105,3975) 6265,3815 6265,2665 v1(6370,2560)
NetR100_2: R100.2 U10.1 | length 217.2
  Top Layer w20: R100.2 2320.98,4260.39 2412.52,4168.86 U10.1
NetR101_2: R101.2 U11.2 | length 161.2
  Top Layer w10: R101.2 1984.61,4240.39 2004.97,4220.03 2004.97,4182.75 U11.2
NetR102_2: R102.2 U12.2 | length 243.8
  Top Layer w10: R102.2 4705,4145 4755,4095 4820,4095 4830.73,4105.73 4830.73,4120.03 4830.66,4120.11 4830.66,4138.11 U12.2@4830.73,4138.18
pads on no net: U1.5 U1.6 U1.7 U2.5 U2.6 U2.7 U3.5 U3.6 U3.7 U4.5 U4.6 U4.7 U5.5 U5.6 U5.7 U6.5 U6.6 U6.7 U7.5 U7.6 U7.7 U8.5 U8.6 U8.7 U10.13 U10.14 U10.15 U10.16 U10.17 U10.18 U10.19 U10.20

## Polygon pours and split planes (outlines as drawn)
GND on Top Layer "GND_L01_P000" (solid, pour order 0): 2015,3900 2065,3850 2215,3850 2265,3900 6525,3900 6720,3705 6720,1535 6505,1320 1625,1320 1360,1585 1360,3750 1510,3900
GND on Top Layer "GND_L01_P001" (solid, pour order 1): 2885,4285 2855,4255 2855,4230 2885,4200 2885,4141.7 2687.89,4010 2325,4010 2305,4030 2305,4035 2300,4035 2275,4010 1770,4010 1715,4065 1715,4425 1770,4480 2020,4480 2020,4440 2060,4480 2180,4480 2250,4410 2250,4375 2305,4320 2315,4330 2450,4330 2450,4333.44 2520,4403.44 2520,4450 2565,4450 2595,4480 2820,4480 2885,4415
GND on Top Layer "GND_L01_P002" (solid, pour order 2): 4710,4240 4710,4150 4755,4105 4810,4105 4810,4205 4840,4235 4840,4240 5025,4240 5110,4155 5110,4035 5080,4005 4890,4005 4890,4015 4875,4030 4870.31,4025.32 4850.31,4025.32 4830,4005 4605,4005 4544.38,4065.62 4546.17,4191.44 4595.43,4240

## Silkscreen, mask and mechanical layers (free items; w line width, h text height)
Top Overlay:
  lines w10: 1360,1320 2550,1320 2550,2510 1360,2510 1360,1320 ; 1360,2710 2550,2710 2550,3900 1360,3900 1360,2710 ; 2750,1320 3940,1320 3940,2510 2750,2510 2750,1320 ; 2750,2710 3940,2710 3940,3900 2750,3900 2750,2710 ; 4140,1320 5330,1320 5330,2510 4140,2510 4140,1320 ; 4140,2710 5330,2710 5330,3900 4140,3900 4140,2710 ; 5530,1320 6720,1320 6720,2510 5530,2510 5530,1320 ; 5530,2710 6720,2710 6720,3900 5530,3900 5530,2710

## Text inside footprints (layer, text, board x,y; h text height)
U1: Top Overlay "*" at 2115,3775 h50 r270; Mechanical 13 "*" at 2069.5,3721.5 h50 r270
U2: Top Overlay "*" at 2125,2395 h50 r270; Mechanical 13 "*" at 2079.5,2341.5 h50 r270
U3: Top Overlay "*" at 3505,3770 h50 r270; Mechanical 13 "*" at 3459.5,3714.5 h50 r270
U4: Top Overlay "*" at 3510,2385 h50 r270; Mechanical 13 "*" at 3464.5,2326.5 h50 r270
U5: Top Overlay "*" at 4905,3780 h50 r270; Mechanical 13 "*" at 4859.5,3726.5 h50 r270
U6: Top Overlay "*" at 4905,2375 h50 r270; Mechanical 13 "*" at 4859.5,2324.5 h50 r270
U7: Top Overlay "*" at 6295,3770 h50 r270; Mechanical 13 "*" at 6249.5,3719.5 h50 r270
U8: Top Overlay "*" at 6290,2385 h50 r270; Mechanical 13 "*" at 6244.5,2331.5 h50 r270